# EAGLE board led driver (EAGLE 6.2)
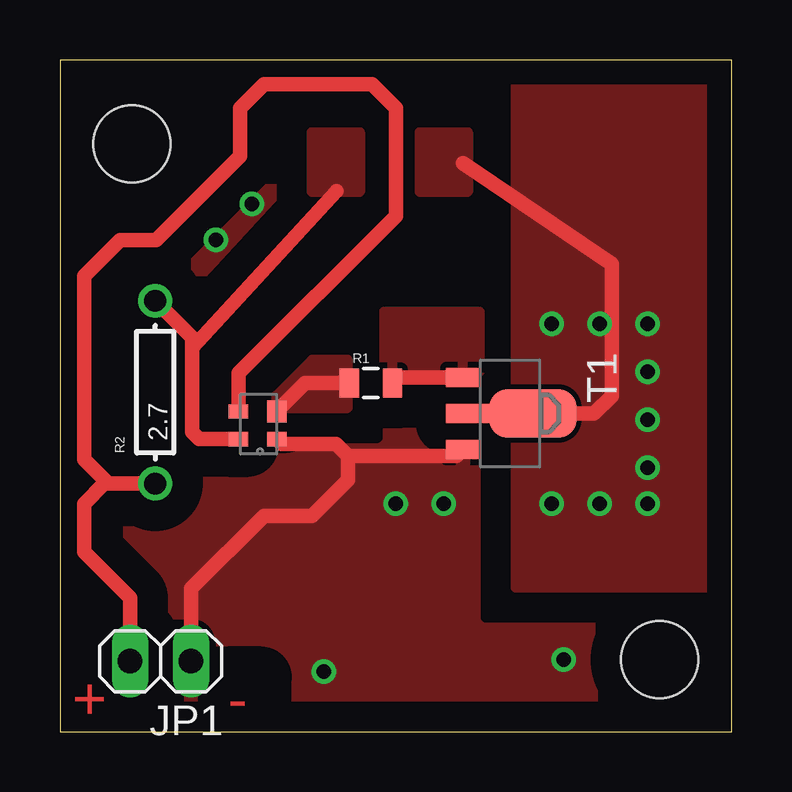
[diagram p0: board, top side]
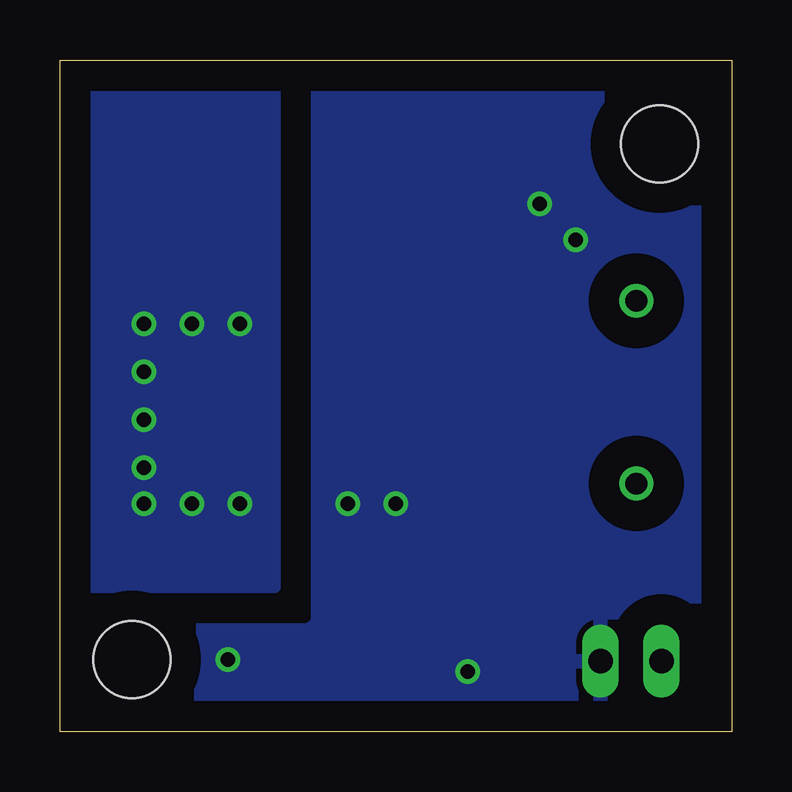
[diagram p1: board, bottom side, seen from below]

Size 28 x 28 mm. Coordinates in mm from the lower left corner, seen from the top.
Outline: 0,0 28,0 28,28 0,28 0,0
Copper layers (1*16): Top 0.035mm / dielectric 1.5mm / Bottom 0.035mm
Design rules: minimum track width 10mil, minimum drill 24mil, track to track 8mil, track to pad 8mil, pad to pad 8mil, via to via 8mil, smd to smd 8mil, copper to edge 40mil, drill to drill 8mil, minimum pad ring 10mil, minimum via ring 8mil, stop-mask expansion 4mil, vias tented up to drill 0mil, thermal gap 10mil
Holes 3.2 mm at 3,24.5 25,3

## Footprints (pad centres in the part's own frame; a part is rotated, then mirrored left to right if it is on the bottom)
1X02 = drill 1.016 long: 1 -1.27,0; 2 1.27,0
0805 = smd 0.8 x 1.2: 1 -0.9,0; 2 0.9,0
AXIAL-0.3 = drill 0.9: P$1 -3.81,0; P$2 3.81,0
SOT89-BCE = smd 0.8 x 1.4: B -1.499,-1.981; E 1.499,-1.981 | smd 0.8 x 1.9: C 0,-1.727 | smd 2.032 x 3.65: C@1 0,0.94
SOT-343 = smd 0.6 x 0.8: GND -0.575,-0.8; REXT -0.575,0.8; VSS 0.575,0.8 | smd 0.9 x 0.8: IOUT 0.575,-0.8

## Placement (x,y rotation side)
JP1  [1X02]  4.19,2.93 180 top
R1  220  [0805]  12.96,14.53 0 top
R2  2.7  [AXIAL-0.3]  3.97,14.15 90 top
T1  [SOT89-BCE]  18.78,13.26 270 top
U$9  BCR401W  [SOT-343]  8.24,12.77 90 top

## Library data of the parts
JP1 = pinhead
R1 R2 = SparkFun
T1 = transistor-neu-to92
U$9 = bcr401w

## Nets
3.3V: JP1.2 R2.P$1 U$9.VSS
GND: JP1.1 T1.E U$9.GND
N$1: R1.2 T1.B
N$2: T1.C
N$42: R1.1 U$9.IOUT
N$46: R2.P$2 U$9.REXT

## Tracks (layer width: path | path; a pad name or v marks a point on that pad's centre or on a via)
3.3V
  Top 0.61: JP1.2 2.92,5.58 1,7.5 1,9.5 1.84,10.34 2,10.34 | R2.P$1 2,10.34 | U$9.VSS 7.44,14.94 14,21.5 14,26 13,27 8.5,27 7.5,26 7.5,24 4,20.5 2.5,20.5 1,19 1,11.34 2,10.34
GND  (via drill 0.6)
  Top 0.61: JP1.1 5.46,5.96 8.5,9 10.5,9 12,10.5 12,11.5 | 12,11.5 11.5,12 9.23,12 U$9.GND | 12,11.5 16.54,11.5 T1.E
  other vias: 16,9.5 8,22 6.5,20.5 14,9.5 21,3 11,2.5
  pour Top (isolate 1.27, rank 3): 0,28 28,28 28,0 0,0
  pour Bottom (isolate 1.27, rank 3): 0,28 28,28 28,0 0,0
N$1
  Top 0.61: T1.B 14.09,14.76 R1.2
  pour Top: 13.5,15 17.5,15 17.5,17.5 13.5,17.5
N$2  (via drill 0.6)
  Top 0.61: 16.81,23.69 23,19.5 23,14 22.26,13.26 T1.C
  other vias: 22.5,9.5 20.5,9.5 24.5,9.5 24.5,17 20.5,17 22.5,17 24.5,15 24.5,13 24.5,11
  pour Bottom (isolate 1.27): 19,28 28,28 28,6 19,6
  pour Top (no thermals): 19,28 28,28 28,6 19,6
  pour Top: 15.5,25 17,25 17,22.5 15,22.5 15,25
N$3  (via drill 0.6)
  other vias: 3,24.5
N$4  (via drill 0.6)
  other vias: 25,3
N$42
  Top 0.61: R1.1 10.22,14.53 U$9.IOUT
  pour Top (no thermals): 9,13.5 12,13.5 12,15.5 10.5,15.5 9,14
N$46
  Top 0.61: U$9.REXT 5.8,12.2 5.5,12.5 5.5,16 | 5.5,16 5.5,16.43 R2.P$2 | 11.54,22.54 5.5,16
  pour Top: 10.5,25 12.5,25 12.5,22.5 10.5,22.5

## Text on the board
Top: + | -